# Altium PCB PC110.PcbDoc (part 14 of 24)
Units mm, origin at the board's own origin, x right, y up, seen from the top; angles counter-clockwise.
Board outline 150.05 x 107.35 mm, 10 copper layers (In2.Cu, F.Cu, B.Cu, In1.Cu, In3.Cu, In4.Cu, In5.Cu, In6.Cu, In7.Cu, In8.Cu); 936 components, 1434 nets, 4891 pads, 6088 vias.
Unrouted connection lines stored in the file: 2995.
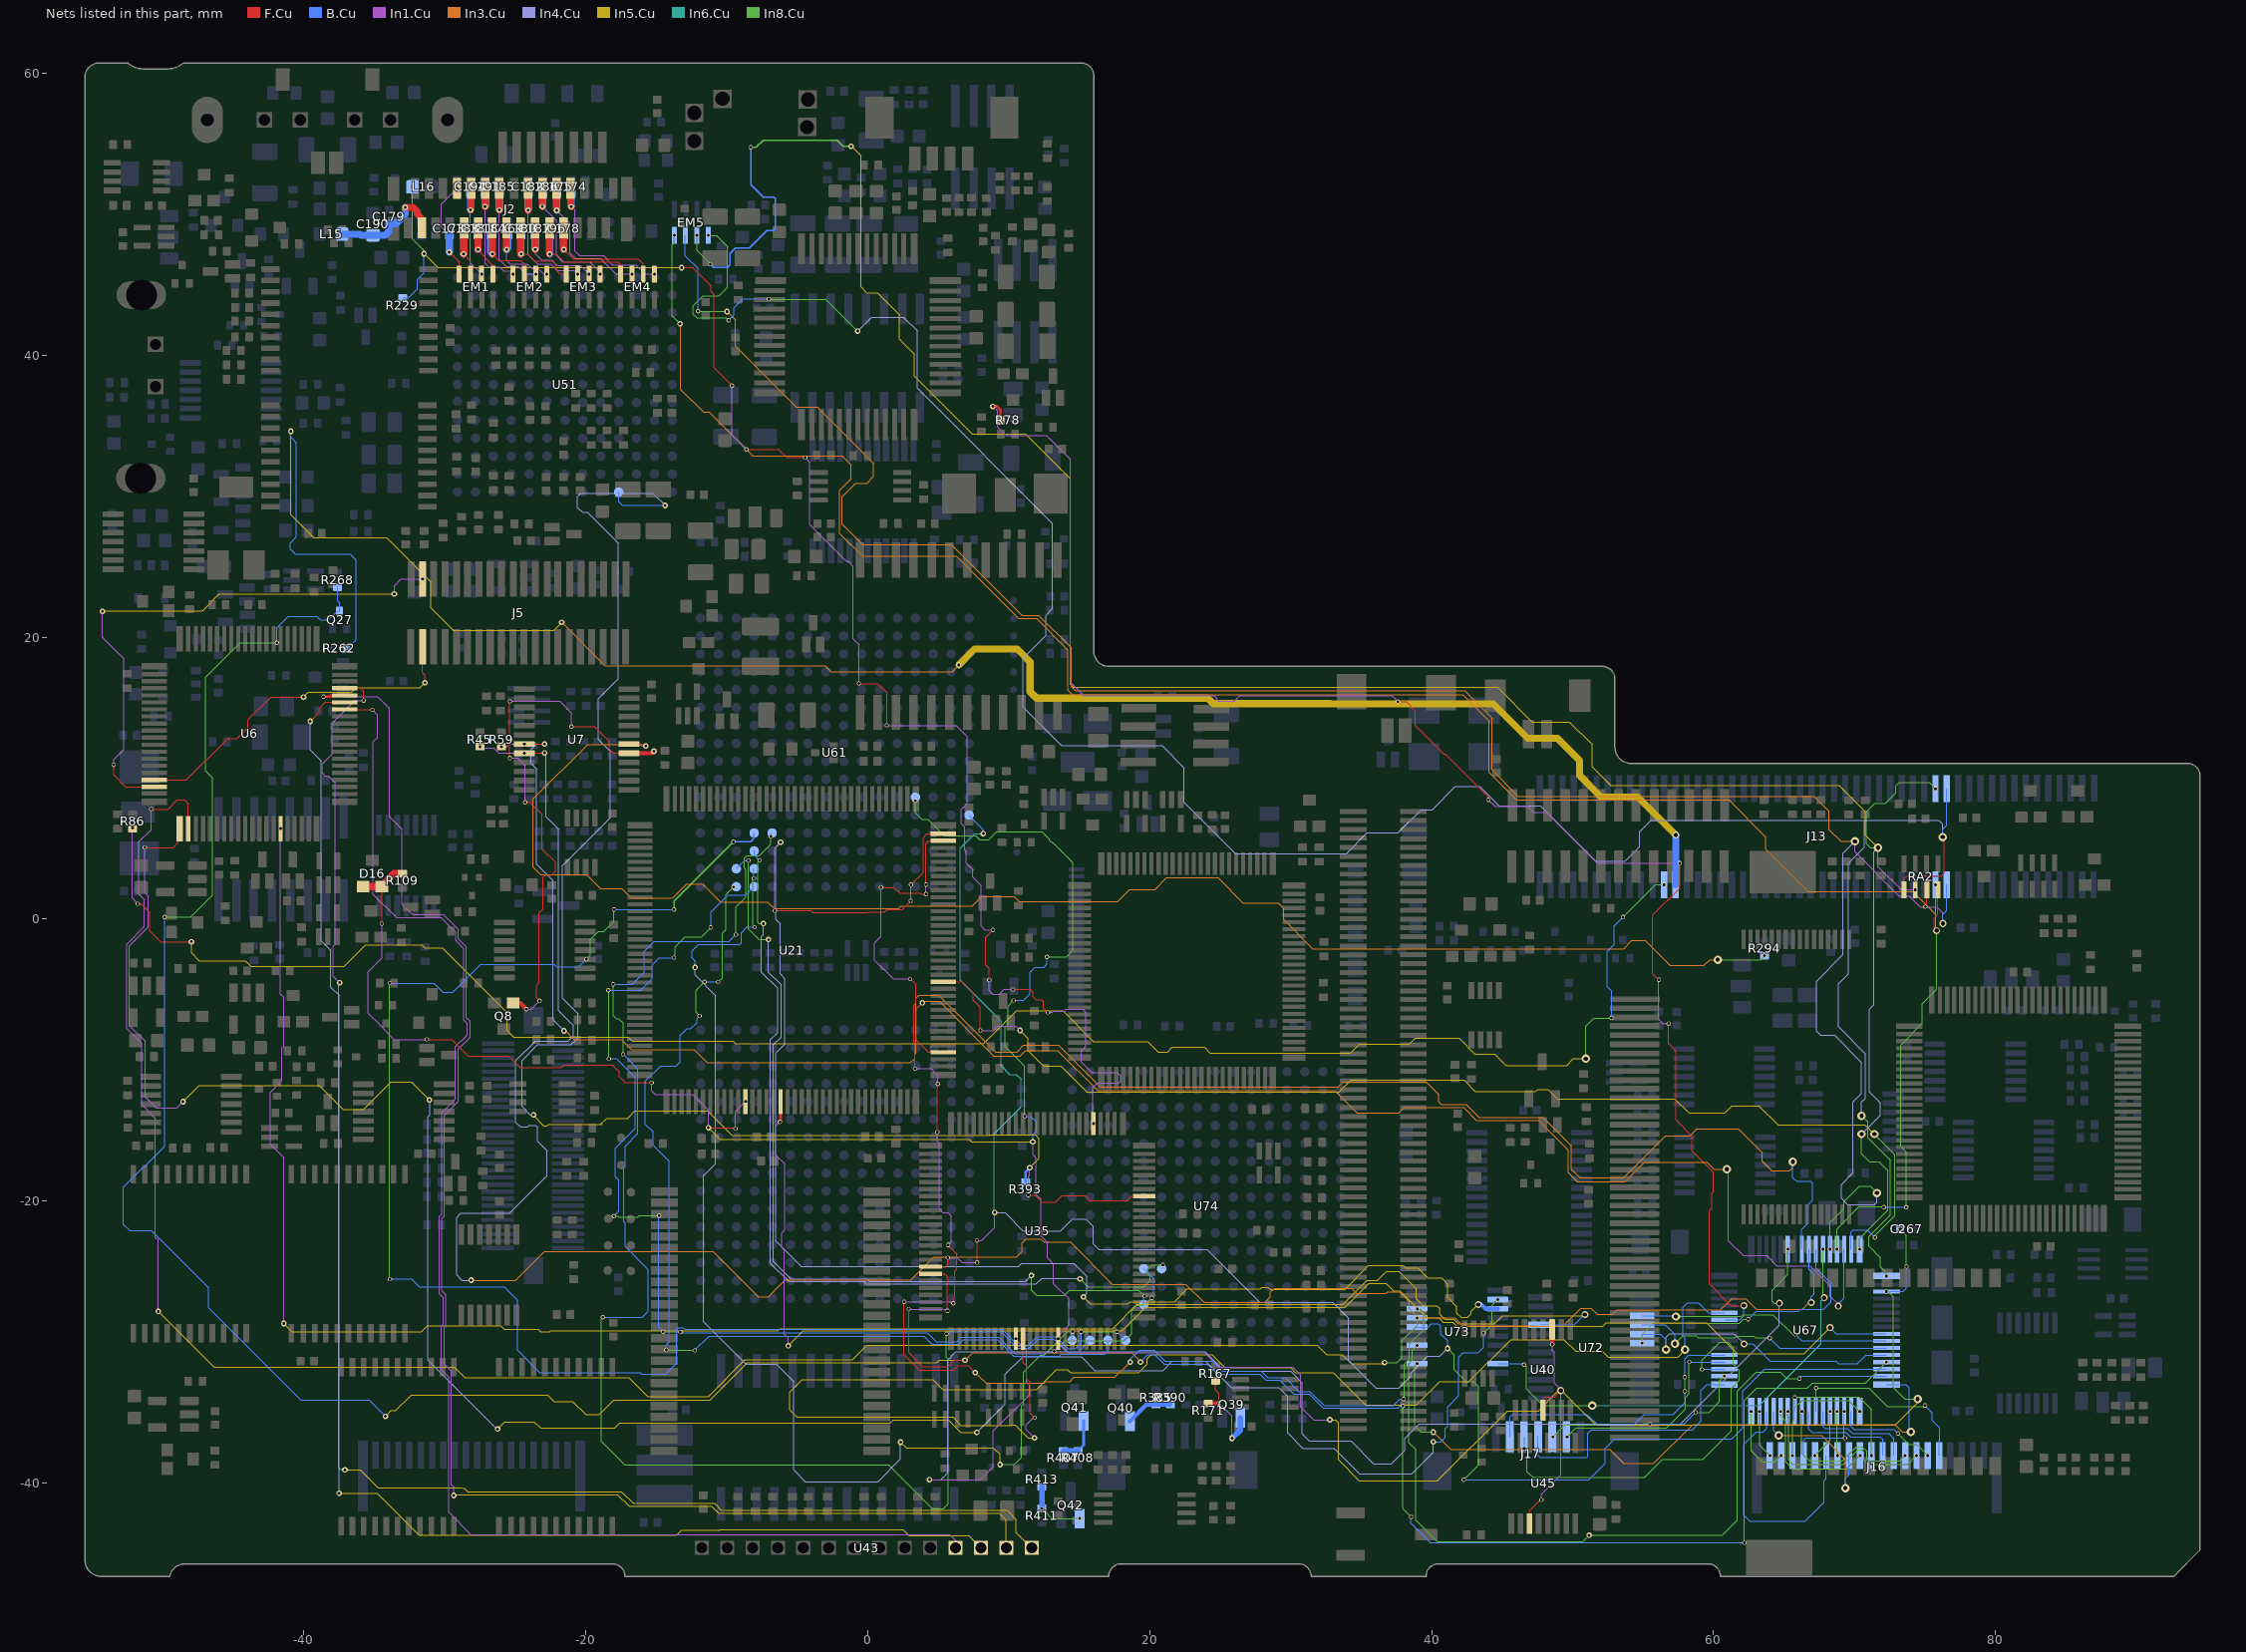
[diagram p21: the nets of this part, all layers, seen from the top]

## Via types
v1: diameter 0.3, hole 0.2, B.Cu to In8.Cu, tented both sides, 1934 vias
v2: diameter 0.4, hole 0.2, F.Cu to B.Cu, tented both sides, 1902 vias
v3: diameter 0.3, hole 0.2, F.Cu to In1.Cu, tented both sides, 1729 vias
v4: diameter 0.6, hole 0.3, F.Cu to B.Cu, tented both sides, 354 vias
v5: diameter 0.5, hole 0.3, F.Cu to B.Cu, tented both sides, 136 vias
v6: diameter 0.4, hole 0.2, B.Cu to In8.Cu, tented both sides, 12 vias
v7: diameter 0.3, hole 0.2, F.Cu to B.Cu, tented both sides, 6 vias
v8: diameter 0.6, hole 0.2, F.Cu to B.Cu, tented both sides, 4 vias
v9: diameter 0.5, hole 0.2, B.Cu to In8.Cu, tented both sides, 3 vias
v10: diameter 0.5, hole 0.2, F.Cu to B.Cu, tented both sides, 2 vias
v11: diameter 0.4, hole 0.3, F.Cu to B.Cu, tented both sides, 2 vias
v12: diameter 0.3, hole 0.2, F.Cu to In4.Cu, tented both sides, 2 vias
v13: diameter 0.6, hole 0.3, B.Cu to In8.Cu, tented both sides, 1 vias
v14: diameter 0.3, hole 0.2, F.Cu to In3.Cu, tented both sides, 1 vias

## Nets (pads, with @x,y where several pads share a name; then routed paths per layer and width w, separated by ;. In a path a pad name is that pad's centre, name@x,y a point inside that pad or via, vN(x,y) a via of type N, cw(c..) or ccw(c..) an arc to the next point about the centre after c; other vN are vias at no path point) (continued)
KB1_3: J17.6 U67.53 | length 20.8
  In8.Cu w0.08: v1(57.96,-33.48) v1(57.96,-32.48)
  B.Cu w0.08: J17.6@45.55,-36.7 45.55,-35.32 45.75,-35.12 51.02,-35.12 51.74,-35.84 54.36,-35.84 55.07,-35.13 57.12,-35.13 57.96,-34.29 v1(57.96,-33.48) ; v1(57.96,-32.48) 57.96,-31.18 58.23,-30.91 U67.53@60.76,-30.91
KB1_4: J17.2 U67.52 | length 15.3
  In8.Cu w0.08: v1(49.61,-36.72) 50.24,-36.09 56.67,-36.09 58.01,-34.75 58.01,-33.92 58.27,-33.66 v1(58.27,-31.39)
  B.Cu w0.08: J17.2@49.55,-36.7 49.57,-36.72 v1(49.61,-36.72) ; v1(58.27,-31.39) 58.29,-31.41 U67.52@60.76,-31.41
KB1_5: J17.5 U67.51 | length 30.1
  In8.Cu w0.08: v1(46.57,-37.53) 46.78,-37.74 46.78,-39.18 47.19,-39.59 55.1,-39.59 56.37,-38.32 59.24,-38.32 61.25,-36.31 61.25,-33.28 61.84,-32.69 61.84,-32 61.41,-31.57 61.41,-30.4 61.01,-30 60.46,-30 59.18,-31.28 v1(59.18,-31.92)
  B.Cu w0.08: J17.5@46.55,-36.7 46.57,-36.72 v1(46.57,-37.53) ; v1(59.18,-31.92) 59.19,-31.91 U67.51@60.76,-31.91
KB1_6: J17.3 U67.50 | length 14.9
  In8.Cu w0.08: v1(48.6,-36.72) 49.45,-35.87 54.92,-35.87 55.02,-35.77 55.43,-35.77 v1(55.47,-35.81) ; v1(58.73,-34.97) 59.67,-34.97 60.42,-34.22 60.42,-32.75 v1(60.76,-32.41)
  B.Cu w0.08: J17.3@48.55,-36.7 48.57,-36.72 v1(48.6,-36.72) ; v1(55.47,-35.81) 57.89,-35.81 v1(58.73,-34.97)
KB1_7: J17.4 U67.49 | length 19
  B.Cu w0.08: J17.4@47.55,-36.7 47.55,-38.04 47.69,-38.18 50.96,-38.18 51.06,-38.08 51.06,-36.48 51.32,-36.22 58.49,-36.22 59.11,-35.6 59.11,-33.44 59.54,-33.01 U67.49@60.76,-33.01
KB2_1: J16.18 U67.33 | length 8.6
  In8.Cu w0.08: v1(65.59,-38.04) 65.59,-35.67 65.73,-35.53 65.73,-34.66 66.27,-34.12 69.57,-34.12 v1(70.36,-34.91)
KB2_2: J16.6 U67.34 | length 7.4
  In8.Cu w0.08: v1(73.08,-36.47) 73.85,-37.24 74.41,-37.24 75.19,-38.02 v1(75.19,-38.04)
  B.Cu w0.08: U67.34@69.76,-34.91 69.76,-35.97 69.97,-36.18 72.79,-36.18 v1(73.08,-36.47)
KB2_3: J16.17 U67.35 | length 6
  In8.Cu w0.08: v1(69.26,-34.91) 69.26,-36.74 v1(69.32,-36.8)
  B.Cu w0.08: J16.17@66.39,-38.04 66.39,-36.98 66.57,-36.8 v1(69.32,-36.8)
KB2_4: J16.14 U67.36 | length 3.2
  In8.Cu w0.08: v1(68.76,-34.91) 68.75,-34.92 68.75,-38 v1(68.79,-38.04)
KB2_5: J16.16 U67.37 | length 3.6
  In8.Cu w0.08: v1(67.19,-38.04) 68.26,-36.97 v1(68.26,-34.91)
KB2_6: J16.9 U67.38 | length 7.7
  B.Cu w0.08: U67.38@67.76,-34.91 67.76,-35.97 67.92,-36.13 69.49,-36.13 69.84,-36.48 72.44,-36.48 72.79,-36.83 J16.9@72.79,-38.04
KB2_7: J16.5 U67.39 | length 13.9
  In8.Cu w0.08: v1(67.275,-33.255) 67.28,-33.25 71.01,-33.25 72.32,-34.56 74.92,-34.56 v1(74.99,-34.49)
  B.Cu w0.08: U67.39@67.26,-34.91 67.26,-33.27 v1(67.275,-33.255) ; v1(74.99,-34.49) 75.51,-35.01 75.51,-35.55 76.03,-36.07 76.03,-36.94 75.99,-36.98 J16.5@75.99,-38.04
KB2_8: J16.10 U67.40 | length 7.9
  B.Cu w0.08: U67.40@66.75,-34.91 66.75,-36.16 66.98,-36.39 69.38,-36.39 69.7,-36.71 71.81,-36.71 71.99,-36.89 J16.10@71.99,-38.04
KB2_9: J16.8 U67.41 | length 11.8
  In8.Cu w0.08: v1(66.26,-34.91) 66.26,-37.88 66.81,-38.43 69.14,-38.43 70.15,-37.42 70.53,-37.42 70.87,-37.76 70.87,-38.24 71.05,-38.42 73.21,-38.42 v1(73.59,-38.04)
KB2_10: J16.11 U67.42 | length 10
  In8.Cu w0.08: v1(65.76,-33.92) 65.78,-33.9 70.3,-33.9 71.19,-34.79 v1(71.19,-38.04)
  B.Cu w0.08: U67.42@65.76,-34.91 v1(65.76,-33.92)
KB2_11: J16.7 U67.43 | length 14.1
  In8.Cu w0.08: v1(65.26,-34.91) 65.26,-35.27 65.31,-35.32 65.31,-38.36 65.62,-38.67 69.22,-38.67 70.25,-37.64 70.51,-37.64 70.51,-37.65 70.68,-37.82 70.68,-38.34 71.01,-38.67 73.76,-38.67 v1(74.39,-38.04)
KB2_12: J16.12 U67.44 | length 9.6
  In8.Cu w0.08: v1(64.76,-34.91) 64.76,-35.24 65.1,-35.58 65.1,-38.49 65.6,-38.99 69.44,-38.99 v1(70.39,-38.04)
KB2_13: J16.13 U67.45 | length 11.8
  In3.Cu w0.08: v4(64.615,-36.605) 64.62,-36.61 67.65,-36.61 69.37,-38.33 69.37,-40.32 v4(69.34,-40.35)
  B.Cu w0.08: U67.45@64.26,-34.91 64.26,-36.25 v4(64.615,-36.605) ; v4(69.34,-40.35) 69.34,-39.65 69.59,-39.4 J16.13@69.59,-38.04
KB2_14: J16.15 U67.46 | length 18.1
  B.Cu w0.08: U67.46@63.76,-34.91 63.76,-36.11 63.51,-36.36 63.03,-36.36 62.14,-37.25 62.14,-42.28 62.55,-42.69 66.5,-42.69 67.83,-41.36 67.83,-39.84 67.99,-39.68 J16.15@67.99,-38.04
KB2_15: J16.20 U67.47 | length 3.4
  In8.Cu w0.08: v1(63.26,-34.91) 63.26,-37.31 v1(63.99,-38.04)
KB2_16: J16.19 U67.48 | length 5.4
  In8.Cu w0.08: v1(62.66,-34.91) 62.66,-37.7 63.46,-38.5 64.33,-38.5 v1(64.79,-38.04)
KB_CAPLED#: U67.27 U72.4 | length 19
  In8.Cu w0.08: v4(57.25,-30.11) 57.83,-29.53 58.74,-29.53 58.91,-29.7 61.52,-29.7 61.64,-29.58 62.86,-29.58 62.98,-29.7 63.97,-29.7 v1(63.98,-29.71)
  B.Cu w0.08: U72.4@54.93,-28.775 56.555,-28.775 57.25,-29.47 v4(57.25,-30.11) ; v1(63.98,-29.71) 64.68,-30.41 U67.27@72.26,-30.41
KB_CNTR#: U35.61 U67.59 | length 103.6
  F.Cu w0.08: U35.61@11.01,-29.75 11.01,-31.44 11.26,-31.69 11.26,-32.6 11.5,-32.84 11.5,-35.02 v3(11.84,-35.36)
  In1.Cu w0.08: v2(11.83,-36.79) 11.24,-36.2 11.24,-35.86 11.74,-35.36 v3(11.84,-35.36)
  In5.Cu w0.08: v2(11.83,-36.79) 11.37,-36.79 10.46,-35.88 10.21,-35.88 10.195,-35.895 6.615,-35.895 6.04,-35.32 -5.02,-35.32 -5.52,-34.82 -5.52,-34.75 -5.53,-34.74 -5.53,-33.53 -4.66,-32.66 4.63,-32.66 5.32,-33.35 11.96,-33.35 13.37,-31.94 14.17,-31.94 14.34,-32.11 14.39,-32.11 14.42,-32.14 19.21,-32.14 19.81,-31.54 19.81,-31.15 20.09,-30.87 24.4,-30.87 25.35,-31.82 30,-31.82 30.33,-32.15 33,-32.15 35.29,-34.44 38.93,-34.44 40.58,-32.79 42.64,-32.79 45.62,-29.81 49.39,-29.81 50.22,-30.64 52.1,-30.64 52.51,-31.05 57.46,-31.05 v4(57.98,-30.53)
  B.Cu w0.08: v4(57.98,-30.53) 57.98,-29.71 57.79,-29.52 57.79,-29.48 57.815,-29.455 57.815,-27.535 58.14,-27.21 58.92,-27.21 59.62,-27.91 U67.59@60.76,-27.91
KB_INIT1: EM5.5 J13.14 RA2.5 U67.17 | length 182.5
  F.Cu w0.08: RA2.5@73.505,2.09 73.505,2.865 73.69,3.05 76.14,3.05 76.37,3.28 76.37,5.71 v4(76.25,5.83)
  In4.Cu w0.08: v2(-0.71,41.71) 0.28,42.7 2.54,42.7 3.505,41.735 3.505,37.655 13.12,28.04 13.12,22.03 12.65,21.56 12.65,20.15 11,18.5 11,15.04 13.73,12.31 20.87,12.31 22.44,10.74 22.44,8.29 26.08,4.65 33.96,4.65 35.43,6.12 37.61,6.12 39.26,7.77 40.04,7.77 41.68,9.41 43.41,9.41 44.77,8.05 47.71,8.05 51.63,4.13 53.73,4.13 54.74,5.14 54.74,6.22 55.55,7.03 70.78,7.03 ; v4(70.5,-13.95) 70.5,-12.97 70.77,-12.7 70.77,-9.55 68.85,-7.63 68.85,-4.58 69.55,-3.88 69.55,3.97 70.69,5.11 70.69,7.03 ; 70.75,7.03 75.95,7.03 76.25,6.73 v4(76.25,5.83)
  In8.Cu w0.08: v1(-11.315,48.5) -10.72,48.5 -9.94,47.72 -9.94,44.81 -10.55,44.2 -11.68,44.2 -12.39,43.49 -12.39,42.92 -12.12,42.65 -10.04,42.65 v1(-9.87,42.48) ; v1(-7.02,43.98) -3.02,43.98 -3.01,43.99 -0.73,41.71 v2(-0.71,41.71) ; v4(70.5,-13.95) 70.93,-14.38 70.93,-15.5 72.54,-17.11 72.54,-20.98 71,-22.52 71,-23.19 71.83,-24.02 71.83,-24.66 72.26,-25.09 v1(72.26,-25.31)
  B.Cu w0.08: v1(-9.87,42.48) -9.5,42.85 -9.5,43.36 -8.87,43.99 -7.03,43.99 v1(-7.02,43.98) ; v4(76.25,5.83) 76.25,6.37 76.54,6.66 J13.14@76.54,9.25
KB_INIT2: EM5.6 J13.15 RA2.6 U67.16 | length 180.1
  In1.Cu w0.08: v4(71.67,5.08) 71.67,3.74 73.32,2.09 v3(74.305,2.09)
  In4.Cu w0.08: v4(70.5,-15.24) 70.97,-14.77 70.99,-14.77 71.84,-13.92 71.84,-13.04 71.04,-12.24 71.04,-6.4 71.38,-6.06 71.38,4.79 v4(71.67,5.08)
  In5.Cu w0.08: v2(-1.18,54.82) -1.16,54.82 -0.49,54.15 -0.49,44.85 -0.08,44.44 0.69,44.44 2.26,42.87 2.26,41.12 3.3,40.08 3.3,38.53 7.42,34.41 11.17,34.41 11.18,34.42 14.36,31.24 14.36,16.68 14.6,16.44 44.66,16.44 47.1,14 49.77,14 51.39,12.38 51.39,10.81 52.7,9.5 68.9,9.5 70.78,7.62 70.78,5.97 v4(71.67,5.08)
  In8.Cu w0.08: v1(-12.115,48.5) -12.115,47.415 v1(-11.16,46.46) ; v1(70.36,-23.41) 70.36,-22.65 72.37,-20.64 72.37,-17.83 71.73,-17.19 71.05,-17.19 70.5,-16.64 v4(70.5,-15.24) ; v4(71.67,5.08) 71.14,5.08 70.85,5.37 70.85,7.63 71.45,8.23 72.2,8.23 72.94,8.97 72.94,9.44 73.19,9.69 75.3,9.69 v1(75.74,9.25)
  In8.Cu w0.1: v1(-8.3,54.75) -7.92,54.75 -7.42,55.25 -2.18,55.25 -1.75,54.82 v2(-1.18,54.82)
  B.Cu w0.1: v1(-11.16,46.46) -10.93,46.23 -9.94,46.23 -9.76,46.41 -9.76,47.23 -9.4,47.59 -8.41,47.59 -7.14,48.86 -6.7,48.86 -6.56,49 -6.56,51.09 -6.69,51.22 -7.41,51.22 -8.3,52.11 v1(-8.3,54.75)
KB_INIT3: EM5.8 J13.86 RA2.8 U67.13 | length 159.4
  F.Cu w0.08: v5(75.82,-0.8) 75.64,-0.62 75.64,0.06 75.905,0.325 RA2.8@75.905,2.09
  In3.Cu w0.08: v2(-13.32,42.23) -13.26,42.17 -13.26,37.57 -11.65,35.96 -11.26,35.96 -8.15,32.85 -1.8,32.85 -1.19,32.24 -1.19,31.23 -1.99,30.43 -1.99,27.36 -0.38,25.75 6.29,25.75 10.71,21.33 11.96,21.33 14.2,19.09 14.2,16.26 14.53,15.93 42.2,15.93 44.08,14.05 44.08,10.4 46.03,8.45 61.08,8.45 63.71,5.82 63.71,4.96 66.71,1.96 74.13,1.96 74.13,1.95 75.74,0.34 75.74,-0.72 v5(75.82,-0.8)
  In8.Cu w0.08: v1(-13.715,48.5) -13.715,47.975 -13.87,47.82 -13.87,42.78 v2(-13.32,42.23) ; v1(68.76,-23.41) 68.76,-21.96 70.32,-20.4 72.05,-20.4 v1(72.07,-20.42) ; v1(73.67,-20.42) 73.67,-16.52 73.27,-16.12 73.27,-8.92 74.8,-7.39 74.8,-6 75.82,-4.98 v5(75.82,-0.8) 75.74,-0.72 v1(75.74,2.45)
  B.Cu w0.08: v1(72.07,-20.42) v1(73.67,-20.42)
KB_INIT4: EM5.7 J13.87 RA2.7 U67.12 | length 167.9
  F.Cu w0.08: v3(75.02,0.88) 75.13,0.99 RA2.7@75.13,2.09
  In1.Cu w0.08: v4(70.02,5.52) 70.02,4.78 73.14,1.66 73.88,1.66 74.66,0.88 v3(75.02,0.88) 75.81,0.88 76.26,0.43 v5(76.26,-0.3)
  In3.Cu w0.08: v2(-9.99,43.1) -9.39,42.5 -9.39,40.65 -5.08,36.34 -3.59,36.34 0.42,32.33 0.42,31.4 -0.05,30.93 -0.85,30.93 -1.8,29.98 -1.8,28.01 -0.37,26.58 5.94,26.58 10.96,21.56 12.12,21.56 14.43,19.25 14.43,16.5 14.73,16.2 42.35,16.2 44.27,14.28 44.27,10.58 46.13,8.72 67.12,8.72 68.2,7.64 68.2,6.36 69.04,5.52 v4(70.02,5.52)
  In4.Cu w0.08: v4(70.02,5.52) 69.19,4.69 69.19,-2.5 67.3,-4.39 67.3,-7.94 67.58,-8.22 68.56,-8.22 70.5,-10.16 70.5,-12.35 69.88,-12.97 69.88,-17.995 69.06,-18.815 69.06,-19.79 69.5,-20.23 71.41,-20.23 71.58,-20.06 v4(71.58,-19.42)
  In8.Cu w0.08: v1(-12.04,43.11) -10,43.11 v2(-9.99,43.1) ; v1(68.26,-23.41) 68.26,-21.5 69.25,-20.51 69.25,-20.04 70.34,-18.95 71.11,-18.95 v4(71.58,-19.42)
  B.Cu w0.08: EM5.7@-12.94,48.5 -12.94,47.04 -12.04,46.14 v1(-12.04,43.11) ; v5(76.26,-0.3) 76.26,0.35 76.32,0.41 76.33,0.41 76.54,0.62 J13.87@76.54,2.45
KB_IRQ1: U21.86 U67.15 | length 85.5
  F.Cu w0.08: U21.86@5.37,-4.44 6.72,-4.44 7.49,-5.21 7.49,-5.74 7.99,-6.24 7.99,-7.88 v3(8,-7.89)
  In1.Cu w0.08: v3(8,-7.89) 8.93,-7.89 9.23,-7.59 10.5,-7.59 v2(10.8,-7.89)
  In5.Cu w0.08: v2(10.8,-7.89) 11.38,-8.47 11.38,-9.3 12.48,-10.4 13.7,-10.4 15.55,-12.25 33.44,-12.25 34.27,-11.42 42.29,-11.42 43.1,-12.23 47.37,-12.23 47.54,-12.06 48.25,-12.06 48.92,-12.73 57.24,-12.73 58.26,-13.75 60.79,-13.75 61.31,-13.23 63.22,-13.23 64.58,-14.59 70.75,-14.59 v4(71.4,-15.24)
  In8.Cu w0.08: v4(71.4,-15.24) 72.85,-16.69 72.85,-21.01 71.44,-22.42 v1(71.44,-22.58)
  B.Cu w0.08: U67.15@69.76,-23.41 69.76,-22.18 69.9,-22.04 70.9,-22.04 v1(71.44,-22.58)
KB_IRQ12: U21.76 U67.14 | length 89.4
  F.Cu w0.08: v2(3.87,-5.93) 3.44,-6.36 3.44,-8.58 4.3,-9.44 U21.76@5.37,-9.44
  In1.Cu w0.08: v4(60.94,-17.73) 61.06,-17.85 61.06,-22.82 62.09,-23.85 63.76,-23.85 64.49,-24.58 66.84,-24.58 68.27,-26.01 68.27,-26.74 68.85,-27.32 v5(68.85,-27.45)
  In3.Cu w0.08: v2(3.87,-5.93) 3.98,-5.82 5.06,-5.82 8.94,-9.7 10.8,-9.7 11.2,-9.3 13.47,-9.3 16.31,-12.14 33.13,-12.14 34.71,-13.72 37.69,-13.72 38.065,-13.345 42.255,-13.345 43.16,-14.25 47.57,-14.25 49.71,-16.39 49.71,-17.98 50.34,-18.61 53.73,-18.61 55.12,-17.22 59.51,-17.22 60.02,-17.73 v4(60.94,-17.73)
  B.Cu w0.08: v5(68.85,-27.45) 68.85,-27.29 69.25,-26.89 69.25,-23.42 U67.14@69.26,-23.41
KB_KBCSMI: U67.32 U73.12 | length 47.1
  In3.Cu w0.08: v2(40.11,-36.38) 41.35,-37.62 52.63,-37.62 53.62,-38.61 55.74,-38.61 58.53,-35.82 72.85,-35.82 73.4,-36.37 v4(74,-36.37)
  In8.Cu w0.08: v1(38.967,-31.525) 38.79,-31.702 38.79,-35.93 39.24,-36.38 v2(40.11,-36.38)
  B.Cu w0.08: U67.32@72.26,-33.01 73.63,-33.01 73.89,-33.27 73.89,-36.26 v4(74,-36.37)
KB_NUMLED#: U67.26 U72.3 | length 18.2
  In8.Cu w0.08: v4(57.32,-28.18) 61.97,-28.18 62.1,-28.05 64.19,-28.05 65.59,-29.45 v1(65.78,-29.45)
  B.Cu w0.08: U72.3@54.93,-28.125 57.265,-28.125 v4(57.32,-28.18) ; v1(65.78,-29.45) 66.24,-29.91 U67.26@72.26,-29.91
KB_PADLED#: U67.28 U72.5 | length 20.3
  In4.Cu w0.08: v4(56.62,-30.52) 56.62,-29.71 56.63,-29.7 56.63,-29.65 56.87,-29.41 61.45,-29.41 v5(62.16,-30.12)
  B.Cu w0.08: U72.5@54.93,-29.425 56.225,-29.425 56.62,-29.82 v4(56.62,-30.52) ; v5(62.16,-30.12) 62.79,-30.12 64.01,-31.34 68.67,-31.34 68.85,-31.52 70.2,-31.52 70.81,-30.91 U67.28@72.26,-30.91
KB_RESET#: C267.2 D16.1 D16.3 R109.2 U21.48 U35.66 U40.4 U40.10 U45.3 U61.N11 U67.19 | length 228.1
  F.Cu w0.08: D16.1@-34.465,2.375 D16.1@-34.465,2.315 -34.465,-0.315 v3(-34.46,-0.32) ; v3(-31.27,-8.53) -29.49,-8.53 -28.33,-9.69 -25.47,-9.69 -24.64,-10.52 -21.72,-10.52 -21.55,-10.35 -18.11,-10.35 -17.62,-10.84 -17.62,-11.15 -17.18,-11.59 v3(-15.33,-11.59) ; v2(-11.3,-14.79) -9.44,-14.79 v3(-9.38,-14.85) ; U45.3@46.945,-42.873 46.945,-41.955 47.71,-41.19 v3(47.79,-41.19) ; U40.4@47.9,-34.825 47.9,-34.03 48.05,-33.88 48.71,-33.88 v5(49.16,-33.43) ; v3@48.55,-30.15 v3(48.56,-30.16)
  F.Cu w0.3: v3@48.55,-30.15 U40.10@48.55,-29.1
  F.Cu w0.5: D16.3@-35.79,2.315 D16.1@-34.465,2.315 ; D16.1@-34.465,2.375 -33.6,3.24 R109.2@-33,3.24
  In1.Cu w0.08: v3(-34.46,-0.32) -34.46,-2.75 -35.43,-3.72 -35.43,-6.65 -34.61,-7.47 -34.61,-7.51 -33.59,-8.53 v3(-31.27,-8.53) ; v3(-15.33,-11.59) -15.33,-12.17 -15.08,-12.42 -12.44,-12.42 -11.3,-13.56 v2(-11.3,-14.79) ; v3(-9.38,-14.85) -9.38,-13.63 v3(-8.67,-12.92) ; v2(11.71,-15.79) 11.71,-16.72 11.95,-16.96 11.95,-19.52 12.29,-19.86 12.29,-22.48 12.75,-22.94 12.75,-24.01 13.18,-24.44 13.18,-25.86 14.26,-26.94 14.26,-28.8 13.51,-29.55 v3(13.51,-29.75) 13.51,-30.02 14.25,-30.76 23.9,-30.76 24.92,-31.78 30.16,-31.78 30.72,-32.34 30.72,-34.6 31.62,-35.5 v2(32.78,-35.5) ; v3(47.79,-41.19) 47.79,-40.78 49.16,-39.41 v5(49.16,-33.43) 49.16,-33.36 48.7,-32.9 48.7,-30.7 48.56,-30.56 v3(48.56,-30.16)
  In5.Cu w0.08: v2(-11.3,-14.79) -10.48,-15.61 7.19,-15.61 7.37,-15.79 v2(11.71,-15.79) ; v2(32.78,-35.5) 33.17,-35.5 33.39,-35.72 33.39,-38.36 34.86,-39.83 40.41,-39.83 45.37,-34.87 47.56,-34.87 49,-33.43 v5(49.16,-33.43) 49.21,-33.43 51.64,-35.86 72.89,-35.86 74.47,-34.28 v4(74.47,-34.03)
  In8.Cu w0.08: v1(3.38,8.39) 3.38,7.53 3.83,7.08 4.25,7.08 5.42,5.91 7.66,5.91 7.94,5.63 8.57,5.63 9.14,6.2 12.36,6.2 12.9,5.66 12.9,5.61 13.1,5.41 13.15,5.41 14.56,4 14.56,-2.2 14.09,-2.67 v1(12.72,-2.67) ; v1(10.35,-5.76) 10.34,-5.76 9.94,-6.16 9.94,-7.48 9.75,-7.67 9.75,-9.04 11.14,-10.43 v1(11.14,-13.97) ; v1(72.26,-26.41) 72.38,-26.41 72.76,-26.79 72.76,-33.22 73.57,-34.03 v4(74.47,-34.03) ; v1(73.225,-21.98) 73.68,-22.435 v1(73.68,-24.65)
  B.Cu w0.08: v1(10.35,-5.76) 11.04,-5.76 11.52,-5.28 11.52,-3.75 11.87,-3.4 12.5,-3.4 12.72,-3.18 v1(12.72,-2.67) ; v1(11.14,-13.97) 11.54,-13.97 11.96,-14.39 11.96,-15.02 11.71,-15.27 v2(11.71,-15.79) ; v1(72.26,-26.41) 73.46,-26.41 73.68,-26.19 v1(73.68,-24.65)
KB_RXD: U67.11 U73.9 | length 33.7
  In6.Cu w0.08: v4(51.4,-34.5) 63.24,-34.5 67.63,-30.11 67.63,-27.06 v5(67.84,-26.85)
  In8.Cu w0.08: v1(46.55,-31.59) 46.71,-31.75 46.71,-33.32 47.89,-34.5 v4(51.4,-34.5) ; v1(67.76,-23.41) 67.77,-23.42 67.77,-26.78 v5(67.84,-26.85)
  B.Cu w0.08: U73.9@44.693,-31.525 46.485,-31.525 v1(46.55,-31.59)
KB_SCLK#: R45.1 U7.8 U67.9 | length 162.2
  F.Cu w0.08: v3(-24.362,11.775) -22.955,11.775 v2(-22.93,11.8)
  In1.Cu w0.08: v3(-27.51,12.24) -27.4,12.13 -26.52,12.13 -26.165,11.775 v3(-24.362,11.775)
  In3.Cu w0.08: v2(-28.13,-25.6) -24.96,-25.6 -22.92,-23.56 -10.98,-23.56 -7.74,-26.8 -7.06,-26.8 -5.85,-25.59 3.06,-25.59 4.68,-23.97 10.54,-23.97 10.94,-23.57 10.94,-22.97 11.24,-22.67 12.26,-22.67 12.49,-22.9 14.36,-22.9 17.36,-25.9 22.56,-25.9 23.84,-27.18 28.17,-27.18 28.57,-26.78 28.57,-26.47 28.86,-26.18 34.3,-26.18 34.66,-26.54 36.74,-26.54 36.86,-26.42 37.7,-26.42 38.43,-27.15 38.43,-27.63 39.06,-28.26 41.63,-28.26 42.2,-28.83 49.34,-28.83 50.58,-27.59 51.3,-27.59 51.74,-28.03 52.85,-28.03 53.165,-27.715 60.485,-27.715 61.29,-26.91 62.28,-26.91 63.04,-27.67 66.3,-27.67 66.78,-27.19 v5(66.92,-27.19)
  In4.Cu w0.08: v2(-28.13,-25.6) -28.78,-25.6 -29.145,-25.235 -29.145,-21.145 -28.85,-20.85 -25.4,-20.85 -22.75,-18.2 -22.75,-16.43 -23.42,-15.76 -23.42,-14.76 -23.55,-14.63 -24.02,-14.63 -24.13,-14.74 -24.62,-14.74 -24.96,-14.4 -24.96,-10.03 -23.56,-8.63 -21.26,-8.63 -20.88,-8.25 -20.88,-7.55 -21.93,-6.5 -21.93,6.39 -22.81,7.27 -22.81,11.68 v2(-22.93,11.8)
  B.Cu w0.08: U67.9@66.76,-23.41 66.76,-24.84 67.13,-25.21 67.13,-26.56 66.92,-26.77 v5(66.92,-27.19)
KB_SCLK_shift: Q8.3 U7.17 | length 39
  F.Cu w0.08: v3(-25.39,11.43) v3(-25.39,15.45) ; v3(-24.3,8.29) -23.97,8.29 -23.11,7.43 -23.11,4.98 -22.16,4.03 -22.16,3.4 -22.43,3.13 -22.87,3.13 -23.02,2.98 -23.02,0.72 -23.3,0.44 -23.3,-4.48 -23.5,-4.68 -23.5,-5.57 v3(-23.28,-5.79) ; v3(-21.01,13.67) -19.4,13.67 -18.34,12.61 -18.34,12.08 -18.035,11.775 U7.17@-16.937,11.775
  F.Cu w0.3: Q8.3@-25.15,-5.945 -24.645,-5.945 v3(-24.21,-6.38) ; U7.17@-16.937,11.775 -15.295,11.775 v2(-15.16,11.91)
  In1.Cu w0.08: v3(-25.39,11.43) -24.82,11.43 -24.3,10.91 v3(-24.3,8.29) ; v3(-25.39,15.45) -21.83,15.45 -21.01,14.63 v3(-21.01,13.67) ; v3(-24.21,-6.38) -23.87,-6.38 v3(-23.28,-5.79)
KB_SCRLED#: U21.53 U67.25 | length 100.9
  F.Cu w0.2: v3(-6.23,-14.38) -6.18,-14.33 U21.53@-6.18,-12.94
  In1.Cu w0.08: v3(-6.23,-14.38) -6.54,-14.69 -6.54,-16.71 -5.89,-17.36 -5.89,-22.06 -6.09,-22.26 -6.09,-23.3 -5.91,-23.48 -5.91,-29.42 -5.63,-29.7 v2(-5.63,-30.26)
  In5.Cu w0.08: v2(-5.63,-30.26) -4.57,-29.2 18.04,-29.2 19.73,-27.51 33.85,-27.51 35.54,-25.82 36.74,-25.82 37.27,-26.35 37.73,-26.35 39.65,-28.27 40.52,-28.27 40.82,-28.57 41.49,-28.57 41.79,-28.87 52.13,-28.87 52.37,-28.63 59.49,-28.63 61.68,-30.82 66.41,-30.82 v5(68.26,-28.97)
  B.Cu w0.08: v5(68.26,-28.97) 68.7,-29.41 U67.25@72.25,-29.41
KB_Sound: R78.1 U67.58 | length 112.6
  F.Cu w0.08: v3(37.61,15.43) 38.2,15.43 38.86,14.77 38.86,13.72 40.87,11.71 40.98,11.71 44.02,8.67 v3(44.02,8.47) ; v3(56.11,-4.3) 55.68,-3.87 55.68,-1.335 55.672,-1.3 55.672,-1 55.68,-0.965 55.68,0.3 57.6,2.22 v3(57.6,3.97) ; v3(56.8,-7.4) 56.8,-8.84 57.33,-9.37 57.33,-14.24 58.48,-15.39 58.48,-16.41 60,-17.93 60,-19.3 60.005,-19.305 59.895,-19.415 59.895,-20.475 59.69,-20.68 59.69,-25.86 61.24,-27.41 v5(62.15,-27.41)
  F.Cu w0.2: v2(8.87,36.37) 9.15,36.37 9.43,36.09 R78.1@9.43,35.4
  In1.Cu w0.08: v2(8.87,36.37) 9.21,36.03 9.21,34.92 9.82,34.31 12.67,34.31 14.37,32.61 14.37,16.8 15.33,15.84 24.56,15.84 24.92,15.48 26.02,15.48 26.39,15.85 37.19,15.85 v3(37.61,15.43) ; v3(44.02,8.47) 44.5,7.99 46.8,7.99 47.22,7.57 48.14,7.57 50.29,5.42 50.29,5.41 51.73,3.97 v3(57.6,3.97) ; v3(56.11,-4.3) 56.11,-7.09 56.42,-7.4 v3(56.8,-7.4)
  B.Cu w0.08: U67.58@60.76,-28.41 61.86,-28.41 62.15,-28.12 v5(62.15,-27.41)
KB_SPKDN: U35.43 U61.T12 U67.30 U73.16 | length 132.5
  F.Cu w0.08: U35.43@4.46,-24.65 5.52,-24.65 5.68,-24.49 v3(5.68,-24.01) ; v3(7.74,-22.78) 7.76,-22.8 v3(7.76,-24.35)
  In1.Cu w0.08: v3(5.68,-24.01) 6.36,-24.01 6.7,-24.35 v3(7.76,-24.35) ; v3(7.74,-22.78) 8.09,-22.78 9,-21.87 v2(9,-20.8)
  In4.Cu w0.08: v2(9,-20.8) 9.73,-20.8 11.03,-22.1 13.67,-22.1 14.51,-21.26 15.46,-21.26 16.01,-21.81 16.01,-23.04 16.4,-23.43 24.07,-23.43 27.8,-27.16 32.96,-27.16 34.09,-28.29 34.09,-31.31 36.05,-33.27 37.66,-33.27 38.51,-32.42 38.51,-32.18 39.71,-30.98 40.59,-30.98 v2(41.13,-30.44)
  In6.Cu w0.08: v2(8.2,6.07) 7.6,6.07 6.56,5.03 6.56,-4.33 9.45,-7.22 9.45,-10.37 10.08,-11 10.53,-11 10.88,-11.35 10.88,-13.31 8.97,-15.22 8.97,-20.77 v2(9,-20.8)
  In8.Cu w0.08: v2(9,-20.8) 9.01,-20.79 ; v2(41.13,-30.44) 41.61,-30.92 41.61,-31.96 42.46,-32.81 42.99,-32.81 43.34,-33.16 43.34,-38.7 v1(42.28,-39.76)
  B.Cu w0.08: U61.T12@7.18,7.38 8.2,6.36 v2(8.2,6.07) ; U73.16@38.967,-28.925 39.745,-28.925 39.96,-28.71 40.47,-28.71 40.64,-28.88 40.64,-29.42 41.13,-29.91 v2(41.13,-30.44) ; v1(42.28,-39.76) 51.15,-39.76 52.31,-38.6 52.31,-37.54 53,-36.85 61.29,-36.85 62.06,-36.08 62.06,-33.48 63.63,-31.91 U67.30@72.26,-31.91
KB_SPKUP: Q27.3 R268.1 U35.44 U67.29 | length 227.4
  F.Cu w0.08: v3(2.91,-27.65) 2.91,-30.74 3.89,-31.72 5.7,-31.72 6.15,-31.27 v2(6.9,-31.27) ; U35.44@4.46,-25.15 5.47,-25.15 5.66,-25.34 v3(5.66,-27.77)
  In1.Cu w0.08: v3(2.91,-27.65) 5.54,-27.65 v3(5.66,-27.77)
  In3.Cu w0.08: v2(6.9,-31.27) 7.43,-30.74 18.65,-30.74 18.66,-30.75 18.73,-30.75 19.34,-31.36 v2(19.34,-31.42)
  In5.Cu w0.08: v2(-34.21,-35.26) -33.81,-34.86 -33.48,-34.86 -32.37,-33.75 -22.71,-33.75 -22.25,-34.21 -20.93,-34.21 -20,-35.14 -19.04,-35.14 -18.01,-34.11 -11.2,-34.11 -8.54,-31.45 4.89,-31.45 5.07,-31.27 v2(6.9,-31.27)
  In8.Cu w0.08: v1(-49.87,0.16) -48.03,0.16 -46.46,1.73 -46.46,10.03 -46.95,10.52 -46.95,17.17 -44.51,19.61 v1(-41.91,19.61) ; v1(37.96,-34.53) 37.96,-41.81 v1(38.54,-42.39) ; v1(62.18,-44.23) 62.18,-34.14 63.06,-33.26 66.65,-33.26 67.01,-32.9 70.77,-32.9 v1(72.26,-31.41)
  B.Cu w0.08: v1(-49.87,0.16) -49.87,-16.1 -52.79,-19.02 -52.79,-21.64 -52.34,-22.09 -50.83,-22.09 -46.77,-26.15 -46.77,-27.56 -40.23,-34.1 -35.37,-34.1 v2(-34.21,-35.26) ; v1(-41.91,19.61) -41.91,20.67 -41.1,21.48 -39.1,21.48 -38.84,21.22 -38.26,21.22 -37.6,21.88 Q27.3@-37.46,21.88 -37.46,22.42 -37.61,22.57 R268.1@-37.61,23.55 ; v2(19.34,-31.42) 19.87,-30.89 20.355,-30.89 21.015,-31.55 24.1,-31.55 24.8,-32.25 27.8,-32.25 28.23,-32.68 29.22,-32.68 30.21,-33.67 31.3,-33.67 32.31,-34.68 37.59,-34.68 37.74,-34.53 v1(37.96,-34.53) ; v1(38.54,-42.39) 38.54,-42.85 39.92,-44.23 v1(62.18,-44.23)
KB_SPKUP_DN: J13.63 R262.1 | length 142.2
  In3.Cu w0.08: v2(-21.7,21.06) -21.7,21.05 -18.64,17.99 -3.03,17.99 -2.6,17.56 5.99,17.56 v2(6.46,18.03)
  In5.Cu w0.08: v2(-40.92,34.61) -40.92,28.68 -39.3,27.06 -34.12,27.06 -30.99,23.93 -30.99,22.08 -29.41,20.5 -22.26,20.5 v2(-21.7,21.06)
  In5.Cu w0.5: v2(6.46,18.03) 7.58,19.15 10.6,19.15 11.51,18.24 11.51,16.14 11.97,15.68 24.11,15.68 24.5,15.29 32.81,15.29 32.83,15.27 44.38,15.27 46.82,12.83 48.92,12.83 50.49,11.26 50.49,10.2 52.02,8.67 54.62,8.67 v5(57.31,5.98)
  B.Cu w0.08: v2(-40.92,34.61) -40.92,34.19 -40.52,33.79 -40.52,27.12 -40.97,26.67 -40.97,26.24 -40.62,25.89 -36.7,25.89 -36.28,25.47 -36.28,19.82 -36.9,19.2 R262.1@-36.97,19.2
  B.Cu w0.5: J13.63@57.29,2.45 57.31,2.47 v5(57.31,5.98)
KB_SRDY#: R59.1 U7.7 U67.8 | length 136.3
  F.Cu w0.08: v3(-24.362,12.425) -22.925,12.425 v2(-22.92,12.43)
  In1.Cu w0.08: v3(-25.98,12.24) -25.59,12.24 -25.405,12.425 v3(-24.362,12.425)
  In3.Cu w0.08: v2(-21.55,-7.92) -21.44,-7.92 -20.83,-8.53 -17.47,-8.53 -16.77,-9.23 -12.33,-9.23 -11.385,-10.175 3.035,-10.175 3.34,-9.87 3.34,-9.58 3.4,-9.52 3.4,-5.6 3.62,-5.38 5.04,-5.38 9.085,-9.425 10.585,-9.425 11.07,-8.94 13.52,-8.94 16.49,-11.91 33.35,-11.91 33.71,-11.55 39.61,-11.55 40.5,-12.44 40.5,-12.95 40.69,-13.14 42.46,-13.14 43.37,-14.05 47.9,-14.05 49.92,-16.07 49.92,-17.73 50.51,-18.32 53.62,-18.32 56.58,-15.36 58.31,-15.36 58.81,-14.86 61.75,-14.86 63.45,-16.56 63.45,-17.17 64.13,-17.85 65.39,-17.85 65.62,-17.62 v4(65.62,-17.21)
  In4.Cu w0.08: v2(-22.92,12.43) -23.48,12.43 -23.87,12.04 -23.87,11.06 -23.48,10.67 -23.48,3.9 -22.33,2.75 -22.33,-7.14 v2(-21.55,-7.92)
  B.Cu w0.08: v4(65.62,-17.21) 65.62,-18.32 65.88,-18.58 66.87,-18.58 67.03,-18.74 67.03,-19.935 66.67,-20.295 66.67,-21.58 66.25,-22 U67.8@66.25,-23.41
KB_SRDY#_shift: R294.1 U7.18 | length 110.1
  F.Cu w0.08: U7.18@-16.937,12.425 -15.885,12.425 v2(-15.75,12.29)
  In3.Cu w0.08: v2(-15.75,12.29) -16,12.29 -16.1,12.39 -19.86,12.39 -23.73,8.52 -23.73,3.7 -23.21,3.18 -19.97,3.18 -18.97,2.18 -17.46,2.18 -16.78,1.5 -13.83,1.5 -12.85,2.48 -11.71,2.48 -10.46,1.23 -7.11,1.23 -6.64,0.76 2.18,0.76 2.37,0.95 7.42,0.95 8.07,1.6 10.38,1.6 10.72,1.26 17.73,1.26 18.59,2.12 20.39,2.12 21.21,2.94 24.83,2.94 26.61,1.16 29.11,1.16 29.5,0.77 29.5,-0.03 31.56,-2.09 53.61,-2.09 54.2,-1.5 55.15,-1.5 56.92,-3.27 59.33,-3.27 59.73,-2.87 v4(60.29,-2.87)
  In8.Cu w0.08: v4(60.29,-2.87) 63.34,-2.87 v1(63.62,-2.59)
KB_TP139: U67.31 U73.14 | length 57.5
  In8.Cu w0.08: v1(38.967,-30.225) 38.64,-30.552 38.64,-31.28 38.38,-31.54 38.38,-37.13 38.87,-37.62 38.87,-42.62 40.4,-44.15 50.71,-44.15 v2(51.17,-43.69) 60.61,-43.69 61.67,-42.63 61.67,-33.46 63.01,-32.12 64.71,-32.12 65.17,-32.58 v1(66.09,-32.58)
  B.Cu w0.08: v1(66.09,-32.58) 66.26,-32.41 U67.31@72.26,-32.41
KB_TXD: U67.10 U72.6 | length 19.3
  In8.Cu w0.08: v1(54.93,-30.075) 54.93,-29.47 55.75,-28.65 61.81,-28.65 62.09,-28.37 v1(62.45,-28.37)
  B.Cu w0.08: v1(54.93,-30.075) 54.93,-30.05 U72.6@54.99,-29.99 ; v1(62.45,-28.37) 63.02,-27.8 65.98,-27.8 66.12,-27.66 67.8,-27.66 68.34,-27.12 68.34,-25.88 68.35,-25.87 67.26,-24.78 U67.10@67.26,-23.41
KBCCS#: U35.60 U67.6 | length 100.4
  In1.Cu w0.08: v2(4.38,-39.75) 8.01,-39.75 8.91,-38.85 8.91,-36.3 11.46,-33.75 11.46,-33.05 11.25,-32.84 11.25,-30.58 v3@10.46,-29.79
  In4.Cu w0.08: v2(4.38,-39.75) 5.2,-39.75 5.68,-39.27 5.68,-31.26 6.25,-30.69 23.93,-30.69 25.3,-32.06 29.99,-32.06 30.82,-32.89 30.82,-36.51 31.32,-37.01 34.27,-37.01 35.88,-38.62 37.16,-38.62 38.09,-37.69 38.09,-36.84 39.13,-35.8 57.65,-35.8 64.66,-28.79 v5(64.66,-27.24)
  In8.Cu w0.08: v5(64.66,-27.24) 64.29,-27.24 64.14,-27.09 64.14,-26.31 65.26,-25.19 v1(65.26,-23.41)
  other v3: 10.51,-29.75
LA17: U61.D13 U74.A4 | length 115.9
  In8.Cu w0.08: v1(-33.91,-4.53) -33.91,-25.49 v1(-33.88,-25.52) ; v1(-19.96,-2.84) -19.66,-2.54 -19.66,-1.43 -19.09,-0.86 -18.7,-0.86 -18,-0.16 v1(-18,0.69) ; v1(15.14,-29.26) v1(17.68,-29.26)
  In8.Cu w0.1: v1(-13.74,0.69) -13.74,1.29 -9.54,5.49 v1(-9.53,5.49)
  B.Cu w0.08: v1(-33.91,-4.53) -30.78,-4.53 -30.14,-5.17 -29.44,-5.17 -27.46,-3.19 -22.26,-3.19 -22.06,-3.39 -20.51,-3.39 v1(-19.96,-2.84) ; v1(-33.88,-25.52) -32.35,-25.52 -31.79,-26.08 -25.8,-26.08 -24.85,-27.03 -24.85,-30.58 -23.27,-32.16 -16.14,-32.16 -16.03,-32.27 -14.34,-32.27 -13.56,-31.49 -13.56,-29.09 -13.43,-28.96 -13.1,-28.96 -12.97,-29.09 9.52,-29.09 10.67,-30.24 11.36,-30.24 12,-29.6 13.34,-29.6 14.2,-30.46 14.74,-30.46 15.14,-30.06 v1(15.14,-29.26) ; v1(-18,0.69) v1(-13.74,0.69) ; v1(17.68,-29.26) 17.695,-29.26 U74.A4@18.305,-29.87
  B.Cu w0.1: v1(-9.53,5.49) -8.3,5.49 -8.06,5.73 U61.D13@-8.06,6.11
LA18: U61.C15 U74.C5 | length 60.3
  In4.Cu w0.08: v2(-7.04,-1.44) -7.04,-3.76 -6.14,-4.66 -6.14,-8.36 -6.69,-8.91 -6.69,-24.28 -5.47,-25.5 -0.06,-25.5 0.11,-25.67 11.18,-25.67 11.2,-25.65 11.23,-25.65 v2(11.61,-25.27)
  In8.Cu w0.08: v1(-8.46,4.17) -8.46,-0.69 -7.71,-1.44 v2(-7.04,-1.44) ; v2(11.61,-25.27) 11.61,-26.31 11.98,-26.68 13.95,-26.68 14.31,-26.32 19.23,-26.32 v1(19.64,-26.73)
  B.Cu w0.08: U61.C15@-9.33,3.57 -9.33,3.58 -8.74,4.17 v1(-8.46,4.17) ; U74.C5@19.57,-27.31 19.57,-26.8 v1(19.64,-26.73)
LA19: U61.C16 U74.A3 | length 71.3
  In8.Cu w0.08: v1(-14.29,-30.55) -12.3,-30.55 v1(-12.27,-30.58) ; v1(-11.93,-6.86) -12.18,-6.61 -12.18,-5.05 v1(-11.57,-4.44) ; v1(-10.61,-4.45) -10.31,-4.15 -10.31,-0.98 -10.07,-0.74 -10.07,1.74 v1(-9.53,2.28)
  B.Cu w0.08: v1(-14.29,-30.55) -14.29,-30.23 -14.07,-30.01 -14.07,-17.17 -15.22,-16.02 -15.22,-15.09 -15.77,-14.54 -15.77,-11.49 -14.68,-10.4 -13.58,-10.4 -13.31,-10.13 -13.31,-8.24 -12.83,-7.76 -12.55,-7.76 -12.11,-7.32 -12.11,-7.04 v1(-11.93,-6.86) ; v1(-12.27,-30.58) -12.27,-30.56 -11.27,-29.56 3.97,-29.56 4.55,-30.14 6.45,-30.14 6.76,-29.83 9.21,-29.83 10.36,-30.98 13.6,-30.98 13.72,-30.86 16.8,-30.86 17.035,-30.625 U74.A3@17.035,-29.87 ; v1(-11.57,-4.44) -10.62,-4.44 v1(-10.61,-4.45)
LA20: U61.D14 U74.E6 | length 61
  In4.Cu w0.08: v2(-7.4,-0.31) -7.4,-1.1 -7.53,-1.23 -7.53,-3.77 -6.39,-4.91 -6.39,-8.03 -6.9,-8.54 -6.9,-24.4 -5.6,-25.7 -0.27,-25.7 -0.11,-25.86 11.95,-25.86 12.35,-25.46 15.02,-25.46 v2(15.07,-25.51)
  In8.Cu w0.08: v1(-7.67,4.17) -7.79,4.05 -7.79,-0.23 -7.71,-0.31 v2(-7.4,-0.31) ; v2(15.07,-25.51) 15.63,-26.07 19.58,-26.07 20.03,-25.62 20.03,-25.32 19.85,-25.14 19.85,-24.84 20.17,-24.52 v1(20.93,-24.52)
  B.Cu w0.08: U61.D14@-8.055,4.845 -8.055,4.555 v1(-7.67,4.17) ; U74.E6@20.84,-24.77 20.93,-24.68 v1(20.93,-24.52)
LA21: U61.E13 U74.A2 | length 107.8
  In8.Cu w0.08: v1(-18.79,-28.23) -18.91,-28.35 -18.91,-37.02 -17.24,-38.69 1.47,-38.69 4.58,-41.8 5.37,-41.8 5.7,-41.47 5.7,-31.22 5.585,-31.105 v1(5.585,-29.404) ; v1(-18.06,-4.61) -18.06,-6.83 -17.84,-7.05 -17.69,-7.05 -17.35,-7.39 v1(-17.35,-9.58) ; v1(-9.35,-1.09) -9.35,0.86 -8.65,1.56 -8.65,3.51 -8.76,3.62 -8.76,4.33 -8.58,4.51 -7.68,4.51 -6.87,5.32 v1(-6.87,5.87)
  B.Cu w0.08: v1(-18.79,-28.23) -15.99,-28.23 -15.56,-27.8 -15.56,-24.88 -17.21,-23.23 -17.21,-21.54 -17.3,-21.45 -17.3,-17.64 -17.2,-17.54 -17.2,-16.09 -16.3,-15.19 -16.3,-10.63 v1(-17.35,-9.58) ; v1(-18.06,-4.61) -16.71,-4.61 -15.85,-3.75 -15.85,-2.28 -15.16,-1.59 -9.85,-1.59 v1(-9.35,-1.09) ; v1(-6.87,5.87) -6.87,6.03 U61.E13@-6.79,6.11 ; v1(5.585,-29.404) 5.756,-29.404 5.9,-29.26 9.45,-29.26 10.61,-30.42 11.43,-30.42 12.07,-29.78 13.22,-29.78 14.1,-30.66 14.975,-30.66 U74.A2@15.765,-29.87
LA22: U61.D15 U74.A1 | length 82.6
  In4.Cu w0.08: v2(-12.25,-3.42) -12.25,-3.95 -10.78,-5.42 -10.78,-17.33 -11.65,-18.2 -11.65,-28.56 -8.65,-31.56 -6.48,-31.56 -5.25,-32.79 -5.25,-39.06 -4.42,-39.89 0.73,-39.89 2.33,-38.29 v2(2.33,-37.09)
  In5.Cu w0.08: v2(2.33,-37.09) 2.73,-37.49 8.9,-37.49 9.38,-37.97 v2(9.38,-38.68)
  In8.Cu w0.08: v1(-8.07,2.9) -8.15,2.82 -8.15,-0.43 v1(-8.02,-0.56) ; v2(9.38,-38.68) 10.4,-38.68 10.91,-38.17 10.91,-34.52 11.06,-34.37 11.06,-32.12 12.27,-30.91 12.51,-30.91 14.17,-29.25 v1(14.54,-29.25)
  B.Cu w0.08: v2(-12.25,-3.42) -12.25,-2.94 -12.46,-2.73 -12.46,-2.25 -12,-1.79 -9.07,-1.79 -8.96,-1.68 -8.96,-0.96 -8.56,-0.56 v1(-8.02,-0.56) ; v1(-8.07,2.9) -8.06,2.91 U61.D15@-8.06,3.57 ; U74.A1@14.495,-29.87 14.495,-29.295 v1(14.54,-29.25)
LA23: U61.D16 U74.E5 | length 85.3
  In8.Cu w0.08: v1(-18.4,-5.04) -18.36,-5.08 v1(-18.36,-9.9) ; v1(-18.01,-21.05) -17.71,-21.05 -17.64,-21.12 -16.32,-21.12 -16.22,-21.02 v1(-14.79,-21.02) v1@-14.88,-21.02 ; v1(-14.51,-29.26) -14.5,-29.27 v1(-13.28,-29.27) ; v1(-13.75,-2.73) -13.65,-2.63 -13.65,-1.95 -12.96,-1.26 -11.8,-1.26 v1(-11.13,-0.59) ; v1(13.22,-30.66) 13.98,-29.9 18.21,-29.9 18.71,-29.4 18.71,-27.77 19.09,-27.39 19.62,-27.39 v1(20.15,-26.86)
  B.Cu w0.08: v1(-18.4,-5.04) -16.115,-5.04 -15.29,-4.215 -15.29,-3.23 -14.79,-2.73 v1(-13.75,-2.73) ; v1(-18.36,-9.9) -17.82,-9.9 -16.5,-11.22 -16.5,-14.84 -17.92,-16.26 -17.92,-18.26 -17.67,-18.51 -17.67,-20.71 v1(-18.01,-21.05) ; v1(-14.79,-21.02) -14.82,-21.05 -14.82,-28.95 v1(-14.51,-29.26) ; v1(-13.28,-29.27) -13.23,-29.32 4.22,-29.32 4.85,-29.95 6.34,-29.95 6.65,-29.64 9.29,-29.64 10.46,-30.81 12.58,-30.81 12.73,-30.66 v1(13.22,-30.66) ; v1(-11.13,-0.59) -11.13,0.52 -9.93,1.72 -8.65,1.72 -8.07,2.3 U61.D16@-8.06,2.3 ; U74.E5@19.57,-24.77 20.28,-25.48 20.28,-26.73 v1(20.15,-26.86)
LCD_24: C174.1 EM4.1 J2.24 | length 11.8
  F.Cu w0.5: J2.24@-21.08,51.83 -21.08,50.59 v2(-21.03,50.54)
  In1.Cu w0.08: v2(-21.03,50.54) -20.77,50.28 -20.77,47.38 -20.45,47.06 -18.76,47.06 -18.12,46.42 -16.45,46.42 -15.79,45.76 v3(-15.125,45.76)
  B.Cu w0.08: v2@-21.04,50.55 v2(-21.03,50.54)
  B.Cu w0.5: v2@-21.04,50.55 C174.1@-21.04,51.47
LCD_B0: C173.1 EM1.4 J2.8 | length 8.3
  F.Cu w0.08: v2(-29.69,47.31) -28.985,46.605 EM1.4@-28.985,45.76
  In1.Cu w0.08: v2(-29.69,47.31) -29.69,48.53 -30.26,49.1 -30.26,50.7 v3(-29.13,51.83)
  B.Cu w0.08: v2(-29.69,47.31) v2@-29.68,47.32
  B.Cu w0.5: v2@-29.68,47.32 C173.1@-29.68,48.5
LCD_B1: C183.1 EM1.3 J2.9 | length 4.8
  F.Cu w0.08: v2(-28.67,47.18) -28.185,46.695 EM1.3@-28.185,45.76
  F.Cu w0.5: v2(-28.67,47.18) -28.63,47.22 J2.9@-28.63,49.03
  B.Cu w0.5: v2(-28.67,47.18) -28.67,48.49 C183.1@-28.66,48.5
LCD_B2: C194.1 EM1.2 J2.10 | length 7.6
  F.Cu w0.5: v2(-28.18,50.3) -28.13,50.35 J2.10@-28.13,51.83
  In1.Cu w0.08: v2(-28.18,50.3) -28.18,46.555 v3(-27.385,45.76)
  B.Cu w0.08: v2(-28.18,50.3) v2@-28.17,50.31
  B.Cu w0.5: v2@-28.17,50.31 C194.1@-28.17,51.47
LCD_B3: C181.1 EM1.1 J2.11 | length 4.7
  F.Cu w0.08: v2(-27.65,47.5) -27.65,47.45 -26.585,46.385 EM1.1@-26.585,45.76
  F.Cu w0.5: v2(-27.65,47.5) -27.63,47.52 J2.11@-27.63,49.03
  B.Cu w0.5: C181.1@-27.67,48.5 -27.65,48.48 v2(-27.65,47.5)
LCD_B4: C180.1 EM3.4 J2.17 | length 7.2
  F.Cu w0.08: v2(-24.59,47.18) -24.11,47.18 -23.63,46.7 -22.38,46.7 -22.16,46.48 -22.16,46.1 -21.82,45.76 EM3.4@-21.375,45.76
  F.Cu w0.5: J2.17@-24.63,49.03 -24.63,47.22 v2(-24.59,47.18)
  B.Cu w0.5: v2(-24.59,47.18) C180.1@-24.59,48.5
LCD_G0: C182.1 EM3.3 J2.18 | length 10
  F.Cu w0.5: v2(-24.09,50.29) -24.08,50.3 J2.18@-24.08,51.83
  In1.Cu w0.08: v2(-24.09,50.29) -24.09,47.15 -23.43,46.49 -22.51,46.49 -22.04,46.02 -20.835,46.02 v3(-20.575,45.76)
  B.Cu w0.08: v2(-24.09,50.29) v2@-24.08,50.3
  B.Cu w0.5: v2@-24.08,50.3 C182.1@-24.08,51.47
LCD_G1: C187.1 EM3.2 J2.19 | length 7.2
  F.Cu w0.5: v2(-23.58,47.5) J2.19@-23.58,49.03
  In1.Cu w0.08: v2(-23.58,47.5) -23.58,47.21 -23.12,46.75 -22.43,46.75 -22.05,46.37 -20.385,46.37 v3(-19.775,45.76)
  B.Cu w0.08: v2@-23.59,47.51 v2(-23.58,47.5)
  B.Cu w0.5: v2@-23.59,47.51 C187.1@-23.59,48.5
LCD_G2: C186.1 EM3.1 J2.20 | length 9.8
  F.Cu w0.5: v2(-23.08,50.55) J2.20@-23.08,51.83
  In1.Cu w0.08: v2(-23.08,50.55) -22.09,49.56 -22.09,47.07 -21.64,46.62 -19.72,46.62 -18.975,45.875 v3(-18.975,45.76)
  B.Cu w0.08: v2(-23.08,50.55) v2@-23.06,50.57
  B.Cu w0.5: v2@-23.06,50.57 C186.1@-23.06,51.47
LCD_G3: C191.1 EM2.4 J2.12 | length 8.6
  F.Cu w0.5: v2(-27.14,50.54) -27.13,50.55 J2.12@-27.13,51.83
  In1.Cu w0.08: v2(-27.14,50.54) -27.14,46.51 -26.89,46.26 -26.1,46.26 -25.81,45.97 -25.365,45.97 v3(-25.155,45.76)
  B.Cu w0.08: v2(-27.14,50.54) v2@-27.13,50.55
  B.Cu w0.5: v2@-27.13,50.55 C191.1@-27.13,51.47
LCD_G4: C184.1 EM2.3 J2.13 | length 6.5
  F.Cu w0.08: v2(-26.63,47.18) -26.17,46.72 -24.61,46.72 -24.355,46.465 EM2.3@-24.355,45.76
  F.Cu w0.5: v2(-26.63,47.18) J2.13@-26.63,49.03
  B.Cu w0.5: C184.1@-26.74,48.5 -26.75,48.49 -26.75,47.3 v2(-26.63,47.18)
LCD_NC_L11: L16.2 R229.1 U35.5 | length 115.9
  F.Cu w0.08: v2(-13.2,46.21) -12.41,46.21 -11.12,44.92 -11.12,44.53 -10.91,44.32 -10.91,39.13 v3(-9.63,37.85) ; v3(-8.61,33.32) -6.33,33.32 -5.75,32.74 v3(-4.43,32.74) ; v3(-0.63,16.72) 0.7,16.72 1.35,16.07 v3(1.35,13.75) ; v3(8.62,-4.32) 8.62,-3.5 8.35,-3.23 8.35,-1.28 v3(8.87,-0.76) ; v3(10.29,-4.98) 11.5,-4.98 11.74,-5.22 11.74,-5.51 11.94,-5.71 12.32,-5.71 12.47,-5.86 12.47,-6.31 v3(12.78,-6.62)
  In1.Cu w0.08: v3(-9.63,37.85) -9.64,37.84 -9.64,34.35 v3(-8.61,33.32) ; v3(-4.43,32.74) -4.1,32.41 -4.1,27.97 -1.52,25.39 -1.41,25.39 -1.05,25.03 -1.05,19.88 -0.63,19.46 v3(-0.63,16.72) ; v3(1.35,13.75) 6.27,13.75 7.05,12.97 7.05,8.2 6.64,7.79 6.64,6.77 6.89,6.52 6.89,4.88 6.99,4.78 6.99,3.97 7.45,3.51 7.45,2.97 8.03,2.39 8.03,-0.49 8.3,-0.76 v3(8.87,-0.76) ; v3(8.62,-4.32) 8.62,-5.08 8.87,-5.33 9.31,-5.33 9.66,-4.98 v3(10.29,-4.98) ; v3(12.78,-6.62) 12.82,-6.58 13.12,-6.58 13.18,-6.52 13.94,-6.52 14.07,-6.39 15.26,-6.39 15.46,-6.59 15.46,-9.01 15.16,-9.31 15.16,-10.13 15.9,-10.87 17.7,-10.87 17.94,-11.11 17.94,-11.46 17.8,-11.6 16.3,-11.6 15.96,-11.94 15.96,-14.45 v3(16.01,-14.5)
  In5.Cu w0.08: v2(-31.47,47.2) -30.48,46.21 v2(-13.2,46.21)
  In8.Cu w0.08: v1(-32.297,51.94) -32.31,51.928 -32.31,48.26 -31.47,47.42 v2(-31.47,47.2)
  B.Cu w0.08: R229.1@-32.99,44.06 -32.57,44.06 -31.93,44.7 -31.93,45.39 -31.47,45.85 v2(-31.47,47.2)
LCD_R0: C185.1 EM2.2 J2.14 | length 9.2
  F.Cu w0.5: v2(-26.13,50.3) J2.14@-26.13,51.83
  In1.Cu w0.08: v2(-26.13,50.3) -26.13,46.8 -25.64,46.31 -24.81,46.31 -24.26,45.76 v3(-23.555,45.76)
  B.Cu w0.5: v2(-26.13,50.3) C185.1@-26.13,51.47
LCD_R1: C169.1 EM2.1 J2.15 | length 6.6
  F.Cu w0.08: v2@-25.63,47.52 v2(-25.61,47.5)
  F.Cu w0.5: v2@-25.63,47.52 J2.15@-25.63,49.03
  In1.Cu w0.08: v2(-25.61,47.5) -25.61,46.72 -25.38,46.49 -24.16,46.49 -23.815,46.145 -23.385,46.145 -23,45.76 v3(-22.755,45.76)
  B.Cu w0.5: v2(-25.61,47.5) -25.52,47.59 C169.1@-25.52,48.5
LCD_R2: C196.1 EM4.4 J2.21 | length 9.2
  F.Cu w0.08: v2@-22.58,47.19 v2(-22.56,47.17) -22.11,47.17 -21.55,46.61 -17.71,46.61 -17.525,46.425 EM4.4@-17.525,45.76
  F.Cu w0.5: v2@-22.58,47.19 J2.21@-22.58,49.03
  B.Cu w0.08: v2(-22.56,47.17) v2@-22.55,47.18
  B.Cu w0.5: v2@-22.55,47.18 C196.1@-22.55,48.5
LCD_R3: C175.1 EM4.3 J2.22 | length 11.2
  F.Cu w0.5: v2@-22.08,50.3 -22.09,50.31 -22.09,51.82 J2.22@-22.08,51.83
  In1.Cu w0.08: v2(-22.06,50.28) -21.13,49.35 -21.13,47.25 -20.74,46.86 -18.98,46.86 -17.88,45.76 v3(-16.725,45.76)
  B.Cu w0.08: v2(-22.06,50.28) v2@-22.05,50.29
  B.Cu w0.5: v2@-22.05,50.29 C175.1@-22.05,51.47
LCD_R4: C178.1 EM4.2 J2.23 | length 9.3
  F.Cu w0.08: v2(-21.55,47.5) -20.865,46.815 -16.265,46.815 -15.925,46.475 EM4.2@-15.925,45.76
  F.Cu w0.5: J2.23@-21.58,49.03 -21.58,47.53 v2(-21.55,47.5)
  B.Cu w0.5: v2(-21.55,47.5) C178.1@-21.55,48.5
LCD_STNDBY#: R393.2 U35.93 U51.K13 | length 114.4
  F.Cu w0.08: v3(11.39,-19.57) 11.88,-19.57 12.36,-20.05 13.32,-20.05 13.77,-19.6 15.41,-19.6 15.76,-19.95 18.42,-19.95 18.72,-19.65 U35.93@19.61,-19.65
  In1.Cu w0.08: v3(11.39,-19.57) 11.39,-18.26 11.49,-18.16 v2(11.49,-17.63)
  In4.Cu w0.08: v2(-23.71,-13.88) -23.94,-13.88 -24.53,-13.29 -24.53,-10.02 -23.41,-8.9 -21.04,-8.9 -20.57,-8.43 -20.57,-6.69 -21.66,-5.6 -21.66,3.79 -18.26,7.19 -18.26,11.89 -19.11,12.74 -19.11,15.65 -17.7,17.06 -17.7,26.67 -19.88,28.85 -20.25,28.85 -20.58,29.18 -20.58,29.98 -20.35,30.21 -15.21,30.21 -15.21,30.18 v2(-14.38,29.35)
  In5.Cu w0.08: v2(-23.71,-13.88) -23.71,-13.93 -23,-14.64 -22.75,-14.64 -22.74,-14.63 -22.7,-14.63 -22.61,-14.54 -18.83,-14.54 -18.95,-14.54 -18.52,-14.11 -17.02,-14.11 -16.51,-13.6 -11.35,-13.6 -9.63,-15.32 8.64,-15.32 8.65,-15.31 11.91,-15.31 12.16,-15.56 12.16,-16.96 v2(11.49,-17.63)
  B.Cu w0.08: U51.K13@-17.67,30.3 -17.67,29.61 -17.41,29.35 v2(-14.38,29.35)
  B.Cu w0.2: R393.2@11.2,-18.64 11.2,-17.92 v2(11.49,-17.63)
LCD_VAA: C179.1 C190.1 J2.3 L15.1 | length 8.2
  F.Cu w0.4: J2.3@-31.63,49.03 J2.3@-31.63,49.68
  F.Cu w0.5: v2(-32.81,50.49) -32.26,50.49 -31.97,50.2 -31.97,50.02 J2.3@-31.63,49.68
  B.Cu w0.5: L15.1@-37.283,48.59 -36.02,48.59 -35.945,48.515 C190.1@-35.1,48.515 -34.225,48.515 -33.96,48.78 C179.1@-33.96,49.34 -33.46,49.34 -32.81,49.99 v2(-32.81,50.49)
M38_21: U6.55 U72.21 | length 136.6
  In1.Cu w0.08: v3(-41.65,6.43) -41.65,-5.32 -41.43,-5.54 -41.43,-9.03 -41.54,-9.14 -41.54,-11.43 -42.38,-12.27 -42.38,-15.96 -41.42,-16.92 v2(-41.42,-28.68)
  In5.Cu w0.08: v2(-41.42,-28.68) -40.85,-29.25 -31.66,-29.25 -31.25,-28.84 -26.04,-28.84 -25.8,-29.08 -23.4,-29.08 -23.21,-29.27 -22.55,-29.27 -22.485,-29.205 -6.375,-29.205 -6.2,-29.03 17.37,-29.03 19.08,-27.32 33.71,-27.32 35.4,-25.63 36.15,-25.63 36.8,-24.98 37.66,-24.98 38.88,-26.2 38.89,-26.2 38.92,-26.23 38.92,-26.92 39.41,-27.41 40.38,-27.41 40.56,-27.59 40.56,-28.01 40.93,-28.38 41.58,-28.38 41.89,-28.69 44.47,-28.69 45.04,-28.12 50.78,-28.12 v5(50.87,-28.03)
  B.Cu w0.08: U72.21@47.73,-28.775 50.125,-28.775 v5(50.87,-28.03)
M38_COM0: U6.77 U43.14 | length 110.9
  F.Cu w0.08: U6.77@-37.1,16.38 -35.96,16.38 -35.76,16.18 v3(-35.76,15.51)
  In1.Cu w0.08: v2(-37.46,-4.5) -37.9,-4.06 -37.9,-1.89 -37.78,-1.77 -37.78,9.67 -38.28,10.17 -38.51,10.17 -38.7,10.36 -38.7,11 -37.99,11.71 -37.99,13.92 -36.4,15.51 v3(-35.76,15.51)
  In5.Cu w0.08: v2(-37.08,-39.06) -36.02,-39.06 -34.75,-40.33 -28.78,-40.33 -28.74,-40.37 -28.6,-40.37 -28.37,-40.6 -17.47,-40.6 -16.64,-41.43 -10.88,-41.43 -10.4,-41.91 9.87,-41.91 10.53,-42.57 10.53,-43.49 U43.14@11.63,-44.59
  In6.Cu w0.08: v2(-37.46,-4.5) -37.525,-4.565 -37.525,-38.9 -37.365,-39.06 v2(-37.08,-39.06)
M38_COM1: U6.76 U43.13 | length 109.3
  F.Cu w0.2: v3(-38.61,15.78) -38.2,15.78 -38.13,15.85 -37.13,15.85 U6.76@-37.1,15.88
  In1.Cu w0.08: v3(-38.61,15.78) -38.59,15.8 -34.77,15.8 -33.91,14.94 -33.91,7.27 -33.02,6.38 -33.02,1.04 -32.3,0.32 -30.09,0.32 -29.04,-0.73 -29.04,-1.38 -28.46,-1.96 -28.46,-6.98 -28.21,-7.23 -28.21,-8.37 -29.04,-9.2 -29.04,-12.93 -30.02,-13.91 -30.02,-21.06 -30.21,-21.25 -30.21,-26.35 -29.91,-26.65 -29.91,-28.86 -30.04,-28.99 -30.04,-31.57 -29.55,-32.06 -29.55,-40.12 -29.37,-40.3 v2(-29.37,-40.87)
  In5.Cu w0.08: v2(-29.37,-40.87) -29.32,-40.82 -17.75,-40.82 -16.93,-41.64 -11.08,-41.64 -10.59,-42.13 9.32,-42.13 9.83,-42.64 U43.13@9.83,-44.59
M38_COM2: U6.75 U43.12 | length 106.2
  F.Cu w0.08: v2(-39.55,14.03) -38.9,14.68 -38.9,14.96 -38.48,15.38 U6.75@-37.1,15.38
  In4.Cu w0.08: v2(-39.55,14.03) -39.55,12 -38.76,11.21 -38.76,-1.55 -38.09,-2.22 -38.09,-4.82 -37.5,-5.41 v2(-37.5,-40.71)
  In5.Cu w0.08: v2(-37.5,-40.71) -34.8,-40.71 -31.83,-43.68 -13.56,-43.68 -13.2,-43.32 -10.49,-43.32 -10.48,-43.31 2.51,-43.31 2.92,-43.72 7.16,-43.72 U43.12@8.03,-44.59
M38_COM3: U6.74 U43.11 | length 102.3
  F.Cu w0.08: U6.74@-37.1,14.88 -35.18,14.88 v3(-35.14,14.84)
  In1.Cu w0.08: v3(-35.14,14.84) -34.76,14.46 -34.76,12.9 -35.07,12.59 -35.07,1.76 -33.42,0.11 -30.27,0.11 -29.22,-0.94 -29.22,-1.52 -28.65,-2.09 -28.65,-7.15 -28.4,-7.4 -28.4,-8.21 -29.24,-9.05 -29.24,-12.75 -30.21,-13.72 -30.21,-20.92 -30.38,-21.09 -30.38,-26.56 -30.09,-26.85 -30.09,-28.74 -30.23,-28.88 -30.23,-31.96 -29.73,-32.46 -29.73,-42.07 -28.15,-43.65 5.82,-43.65 6.23,-44.06 U43.11@6.23,-44.59
M38_P10_R413: Q42.3 R411.2 R413.1 | length 4.5
  In8.Cu w0.08: v1(12.35,-41.79) 13.07,-42.51 v1(15.03,-42.51)
  B.Cu w0.4: v1(12.35,-41.79) R413.1@12.35,-40.25
M38_P11_R167: Q39.3 R167.1 R171.2 | length 7
  F.Cu w0.08: R167.1@24.67,-32.74 24.67,-33.38 24.92,-33.63 v3(24.92,-34.32)
  F.Cu w0.3: R171.2@24.16,-34.35 24.89,-34.35 v3(24.92,-34.32)
  In1.Cu w0.08: v3(24.92,-34.32) 25.84,-35.24 v2(25.84,-36.81)
  B.Cu w0.4: v2(25.84,-36.81) 26.43,-36.22 Q39.3@26.43,-35.37
M38_P12_R407: Q41.3 R407.2 R408.2 | length 3.3
  B.Cu w0.2: R408.2@14.91,-37.7 15.31,-37.3 Q41.3@15.31,-35.59
  B.Cu w0.4: R407.2@13.88,-37.7 R408.2@14.91,-37.7
M38_P13_R390: Q40.3 R385.1 R390.1 | length 3.4
  B.Cu w0.3: Q40.3@18.59,-35.61 19.78,-34.42 R385.1@20.44,-34.42 R390.1@21.47,-34.42
M38_P14: U6.42 U73.17 | length 138.5
  F.Cu w0.08: v3(-50.83,7.81) -49.61,7.81 -48.97,8.45 -48.46,8.45 -48.2,8.19 U6.42@-48.2,6.43
  In1.Cu w0.08: v3(-50.83,7.81) -50.83,6.34 -51.69,5.48 -51.69,1.77 -51.32,1.4 -51.32,-0.52 -52.57,-1.77 -52.57,-7.75 -51.51,-8.81 -51.51,-13.15 -50.53,-14.13 -50.53,-22.57 -50.33,-22.77 v2(-50.33,-27.82)
  In5.Cu w0.08: v2(-50.33,-27.82) -46.38,-31.77 -29.32,-31.77 -28.58,-32.51 -16.96,-32.51 -15.62,-33.85 -11.3,-33.85 -8.7,-31.25 -1.07,-31.25 -0.05,-30.23 31.89,-30.23 32.54,-30.88 33.65,-30.88 34.3,-31.53 36.57,-31.53 v2(36.66,-31.44)
  In8.Cu w0.08: v2(36.66,-31.44) 37.53,-31.44 37.89,-31.08 37.89,-29.91 38.967,-28.833 v1(38.967,-28.275)
M38_P14_Buf: U21.107 U73.3 | length 109
  F.Cu w0.08: v3(-6.59,0.6) -4.04,0.6 -3.91,0.47 0,0.47 0.05,0.52 1.2,0.52 1.38,0.7 2.45,0.7 v3(3.05,1.3) ; v3(3.06,2.45) 3.93,3.32 3.93,5.79 4.2,6.06 U21.107@5.37,6.06
  In1.Cu w0.08: v3(-6.59,0.6) -6.59,5.05 v2(-6.18,5.46) ; v3(3.05,1.3) 3.05,2.44 v3(3.06,2.45)
  In4.Cu w0.08: v2(-6.18,5.46) -6.52,5.12 -6.52,-0.02 -6.21,-0.33 -6.21,-3.89 -5.87,-4.23 -5.87,-8.86 -6.505,-9.495 -6.505,-22.815 -4.7,-24.62 10.71,-24.62 10.91,-24.42 14.62,-24.42 15.54,-25.34 15.54,-26.54 v2(15.3,-26.78)
  In5.Cu w0.08: v2(15.3,-26.78) 15.8,-27.28 18.45,-27.28 18.61,-27.12 21.76,-27.12 22.66,-26.22 27.83,-26.22 27.95,-26.1 28.39,-26.1 28.54,-26.25 33.84,-26.25 35.52,-24.57 37.96,-24.57 38.14,-24.75 39.01,-24.75 39.71,-25.45 40.7,-25.45 41.15,-25.9 41.15,-26.86 41.17,-26.86 41.79,-27.48 41.79,-27.95 42.085,-28.245 42.565,-28.245 42.81,-28 42.81,-27.82 v5(43.3,-27.33)
  B.Cu w0.3: v5(43.3,-27.33) 43.53,-27.33 43.825,-27.625 U73.3@44.693,-27.625
M38_P15: U6.41 U73.2 | length 161.7
  F.Cu w0.08: v3(-51.28,5.09) -49.28,5.09 -48.8,5.57 U6.41@-48.8,6.43
  In1.Cu w0.08: v3(-51.28,5.09) -51.28,1.9 -51.04,1.66 -51.04,-0.56 -52.36,-1.88 -52.36,-7.55 -51.26,-8.65 -51.26,-12.59 -50.45,-13.4 -49.03,-13.4 v2(-48.57,-12.94)
  In4.Cu w0.08: v2(-31.09,-12.82) -31.05,-12.86 -31.05,-13.87 -31.21,-14.03 -31.21,-31.27 -26.32,-36.16 v2(-26.26,-36.16) ; v2(7.74,-36.4) 7.74,-36.39 9.76,-34.37 9.76,-32.28 11,-31.04 15.16,-31.04 16.12,-32 20.94,-32 21.58,-31.36 23.94,-31.36 25.8,-33.22 29.17,-33.22 29.79,-33.84 29.79,-36.45 30.86,-37.52 33.08,-37.52 34.88,-39.32 38.61,-39.32 40.11,-37.82 v2(40.11,-37.07)
  In5.Cu w0.08: v2(-48.57,-12.94) -47.43,-11.8 -38.91,-11.8 -37.21,-13.5 -35.77,-13.5 -33.81,-11.54 -32.37,-11.54 v2(-31.09,-12.82) ; v2(-26.26,-36.16) -25.75,-35.65 -23.66,-35.65 -23.22,-36.09 -17.93,-36.09 -17.58,-35.74 1.58,-35.74 1.81,-35.51 5.71,-35.51 6.6,-36.4 v2(7.74,-36.4)
  In8.Cu w0.08: v1(43.68,-29.35) 44.27,-28.76 44.27,-27.397 v1(44.692,-26.975)
  B.Cu w0.08: v2(40.11,-37.07) 40.12,-37.08 40.66,-37.08 40.98,-36.76 40.98,-36.11 41.13,-35.96 41.13,-34.58 41.93,-33.78 41.93,-31.05 42.25,-30.73 43.31,-30.73 43.68,-30.36 v1(43.68,-29.35)
M38_P15_Buf: U21.106 U73.18 | length 96.4
  F.Cu w0.08: v3(0.94,2.26) 1.87,2.26 2.29,1.84 3.69,1.84 3.75,1.78 v3(4.13,1.78) ; v3(2.59,-27.14) 2.58,-27.15 2.58,-30.89 3.67,-31.98 6.11,-31.98 6.42,-31.67 7.13,-31.67 v2(7.62,-32.16) ; v3(3.01,-4.24) 3.4,-4.63 3.4,-5.93 3.26,-6.07 3.26,-8.82 3.36,-8.92 v3(3.36,-10.6) ; v3(4.14,2.46) 4.14,5.35 4.35,5.56 U21.106@5.37,5.56 ; v3(4.94,-15.1) 4.94,-11.72 v3(4.97,-11.69) ; v3(5.69,-23.11) 6.32,-23.74 6.32,-24.79 6.16,-24.95 6.16,-26.8 6.07,-26.89 v3(6.07,-27.24)
  In1.Cu w0.08: v3(0.94,2.26) 0.94,-1.22 0.49,-1.67 0.49,-2.92 1.81,-4.24 v3(3.01,-4.24) ; v3(2.59,-27.14) 5.97,-27.14 v3(6.07,-27.24) ; v3(3.36,-10.6) 4.49,-10.6 4.97,-11.08 v3(4.97,-11.69) ; v3(4.13,1.78) 4.13,2.45 v3(4.14,2.46) ; v3(4.94,-15.1) 4.94,-15.75 5.06,-15.87 5.06,-20.54 5.33,-20.81 5.68,-20.81 5.91,-21.04 5.91,-22.89 v3(5.69,-23.11)
  In3.Cu w0.08: v2(7.62,-32.16) 8.13,-32.67 8.15,-32.67 8.39,-32.91 12.52,-32.91 12.62,-32.81 12.66,-32.81 12.68,-32.79 14.34,-32.79 14.64,-32.49 17.54,-32.49 v2(18.62,-31.41)
  In8.Cu w0.08: v1(38.01,-34.03) 38.05,-33.99 38.05,-31.57 38.43,-31.19 38.43,-30.12 39.45,-29.1 39.45,-27.93 39.166,-27.646 v1(38.989,-27.646)
  B.Cu w0.08: v2(18.62,-31.41) 18.62,-31.21 19.28,-30.55 20.31,-30.55 21.11,-31.35 24.44,-31.35 25.14,-32.05 27.92,-32.05 28.38,-32.51 29.6,-32.51 30.58,-33.49 31.36,-33.49 32.36,-34.49 37.27,-34.49 37.73,-34.03 v1(38.01,-34.03) ; U73.18@38.967,-27.625 v1(38.989,-27.646)
M38_P16_R86: J13.62 R86.1 | length 135.6
  F.Cu w0.08: R86.1@-52.14,6.42 -52.15,6.43 v3(-52.15,6.46) R86.1@-52.14,6.45 ; v3(-51.77,1.09) -51.52,1.09 -50.91,0.48 -50.91,-0.84 -50.15,-1.6 v2(-47.97,-1.6)
  F.Cu w0.3: v3(-52.15,6.46) R86.1@-52.13,6.48
  In1.Cu w0.08: v3(-52.15,6.46) -52.18,6.43 -52.18,1.5 v3(-51.77,1.09)
  In5.Cu w0.08: v2(-47.97,-1.6) -47.97,-2.4 -47.42,-2.95 -44.14,-2.95 -43.74,-3.35 -37.14,-3.35 -35.61,-1.82 -31.62,-1.82 -31.41,-2.03 -30.17,-2.03 -25.57,-6.63 -25.57,-7.9 -25.11,-8.36 -16.99,-8.36 -16.71,-8.64 -9.56,-8.64 -9.39,-8.81 8.24,-8.81 10.55,-6.5 13.84,-6.5 16.02,-8.68 19.86,-8.68 20.59,-9.41 21.26,-9.41 21.59,-9.08 23.87,-9.08 24.27,-9.48 34.26,-9.48 34.89,-8.85 38.43,-8.85 38.85,-8.43 41.94,-8.43 43.06,-9.55 44.45,-9.55 45.27,-10.37 49.58,-10.37 50.05,-9.9 v4(50.93,-9.9)
  In8.Cu w0.08: v4(50.93,-9.9) 50.93,-7.57 51.49,-7.01 v1(52.76,-7.01) ; v1(53.57,0.15) 55.87,2.45 v1(56.49,2.45)
  B.Cu w0.08: v1(52.76,-7.01) 52.76,-5.1 52.44,-4.78 52.44,-2.28 52.94,-1.78 52.94,-0.48 v1(53.57,0.15)
M38_P20: J5.19 U6.38 | length 39.8
  F.Cu w0.08: v3(-53.49,10.95) -53.49,10.22 -52.65,9.38 U6.38@-50.6,9.38
  In1.Cu w0.08: v2(-54.28,21.83) -54.28,19.99 -52.77,18.48 -52.77,12.05 -53.49,11.33 v3(-53.49,10.95) ; v2(-33.58,23.07) -33.58,23.65 -33.1,24.13 v3(-31.58,24.13)
  In5.Cu w0.08: v2(-54.28,21.83) -54.23,21.88 -47.19,21.88 -46,23.07 v2(-33.58,23.07)
M38_P21: J5.22 U6.37 | length 25
  F.Cu w0.08: U6.37@-50.6,9.88 -48.34,9.88 -45.39,12.83 -44.73,12.83 -43.95,13.61 -43.95,14.15 -42.34,15.76 v2(-40.02,15.76) ; J5.22@-31.58,19.33 -31.58,17.47 -31.41,17.3 v2(-31.41,16.78)
  In5.Cu w0.08: v2(-40.02,15.76) -39.68,16.1 -36.6,16.1 -36.27,16.43 -31.76,16.43 v2(-31.41,16.78)